# Altium PCB JlinkAdapter.PcbDoc
Units mil, origin at the board's own origin, x right, y up, seen from the top; angles counter-clockwise.
Board outline 669.29 x 1062.99 mil, 2 copper layers (Component Side, Bottom Layer), stack 63.824 mil thick; 4 components, 11 nets, 42 pads, 7 vias.
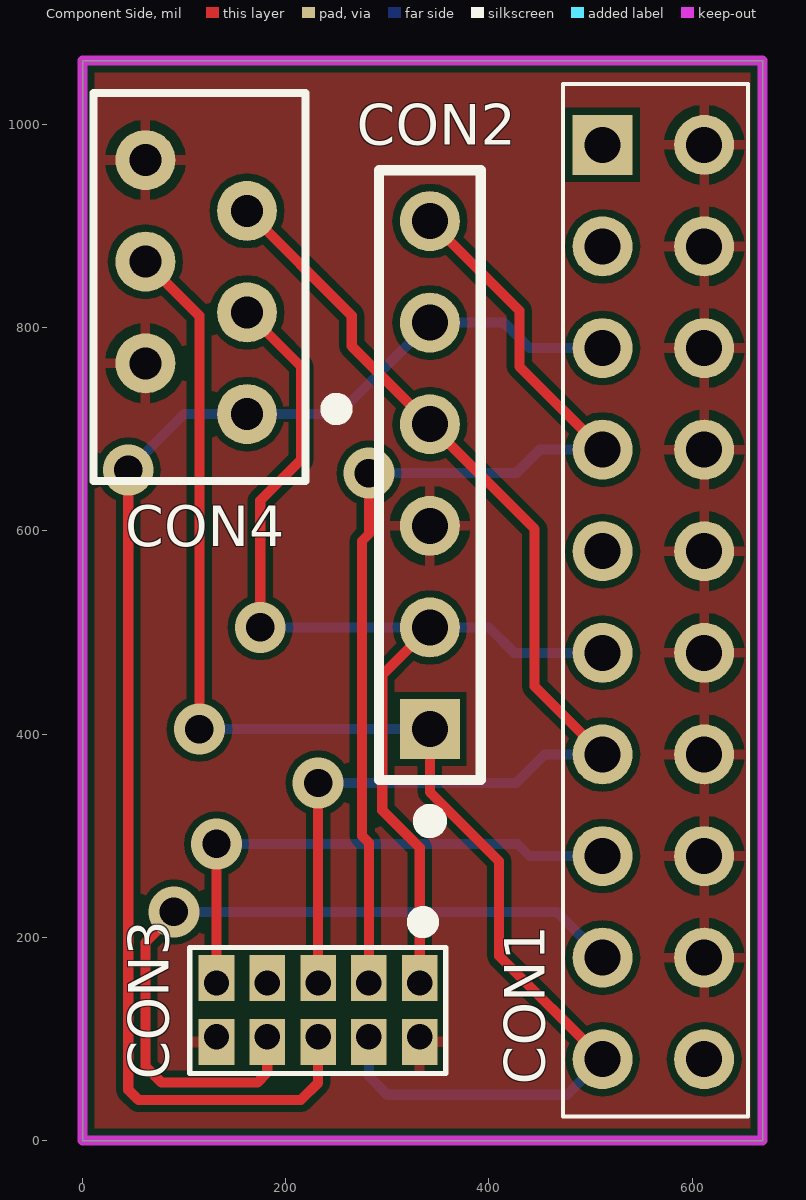
[diagram p0: Component Side view]
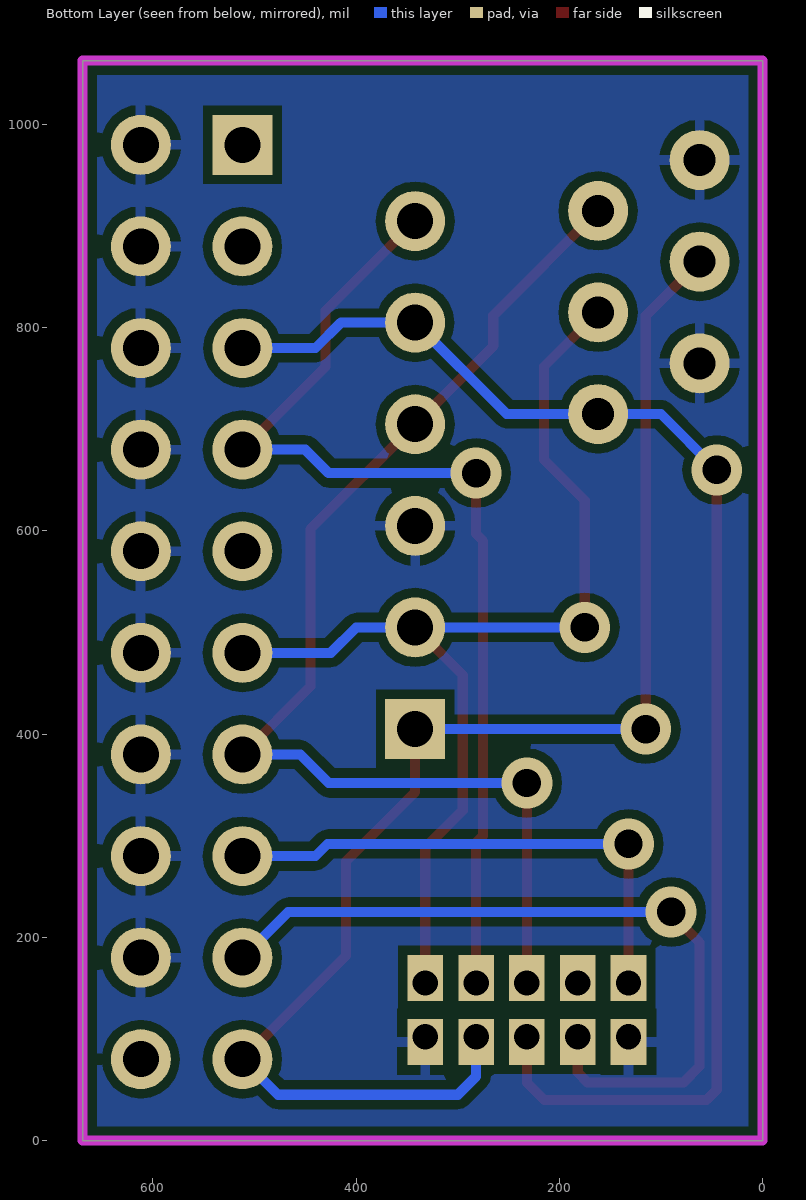
[diagram p1: Bottom Layer view, seen from below]

## Layer stack, top to bottom
Top Solder: solder mask 0.4, Solder Resist, Dk 3.5
Component Side: signal copper 1.4
Dielectric 1: core 61.0236, FR-4, Dk 4.2
Bottom Layer: signal copper 1.4
Solder Side: solder mask 0.4, Solder Resist, Dk 3.5

## Board outline
0,0 669.29,0 669.29,1062.99 0,1062.99

## Design rules (kind name [scope] priority, off if disabled: settings)
Clearance "Stitching GNDA" [IsStitchingVia and InNet('GNDA') vs (IsVia and (Not IsStitchingVia)) Or IsPad] p1: gap=5
Clearance Clearance_BOT [InNamedPolygon('GND_BOT')] p2: gap=9
Clearance Clearance_TOP [InNamedPolygon('GND_BOT')] p3: gap=9
Clearance [All] p4: gap=7
DiffPairsRouting DiffPair_100_2DiffPairsRouting [InDifferentialPairClass('DIFF100_2')] p1: maxlimit=10 minlimit=10 mostfreqgap=10 toplayer_minwidth=8 toplayer_maxwidth=15 toplayer_prefwidth=15 bottomlayer_minwidth=8 bottomlayer_maxwidth=15 bottomlayer_prefwidth=15 maxuncoupledlength=500
DiffPairsRouting DiffPair_100DiffPairsRouting [InDifferentialPairClass('DIFF100')] p2: maxlimit=10 minlimit=10 mostfreqgap=10 toplayer_minwidth=8 toplayer_maxwidth=15 toplayer_prefwidth=15 bottomlayer_minwidth=8 bottomlayer_maxwidth=15 bottomlayer_prefwidth=15 maxuncoupledlength=500
DiffPairsRouting [All] p3: maxlimit=10 minlimit=8 mostfreqgap=8 toplayer_minwidth=8 toplayer_maxwidth=30 toplayer_prefwidth=8 bottomlayer_minwidth=8 bottomlayer_maxwidth=30 bottomlayer_prefwidth=8 maxuncoupledlength=500
Height [All] p1: minheight=0 maxheight=2000 prefheight=500
HoleSize [All] p1: absolutevalues=TRUE maxlimit=200 minlimit=1 maxpercent=80.000 minpercent=20.000
MatchedLengths DiffPair_100_2MatchedLengths [InNetClass('DIFF100_A')] p1: tolerance=1000 checknetsindiffpair=TRUE checkdiffpairvsdiffpair=FALSE checkxsignals=FALSE checkothers=FALSE
MatchedLengths DiffPair_100MatchedLengths [InNetClass('DIFF100_B')] p2: tolerance=5 checknetsindiffpair=TRUE checkdiffpairvsdiffpair=FALSE checkxsignals=FALSE checkothers=FALSE
MinimumSolderMaskSliver [All] p1: minsoldermaskwidth=1
PasteMaskExpansion [InNet('230V_N')] p1: expansion=20
PlaneClearance [All] p1: clearance=10
PlaneConnect MotConnect [InNetClass('MOT[8..1]')] p1: planeconnectstyle=Direct reliefexpansion=20 reliefentries=4 reliefconductorwidth=10 reliefairgap=10
PlaneConnect Via_Thermal_Relief [IsStitchingVia Or IsVia] p2: planeconnectstyle=Direct reliefexpansion=20 reliefentries=4 reliefconductorwidth=10 reliefairgap=40
PlaneConnect ShieldConnect [InNet('SHIELD')] p3: planeconnectstyle=Relief reliefexpansion=20 reliefentries=4 reliefconductorwidth=10 reliefairgap=40
PlaneConnect [All] p4: planeconnectstyle=Relief reliefexpansion=8 reliefentries=4 reliefconductorwidth=8 reliefairgap=5
PolygonConnect GNDA_VIA_CONN [InNet('GND') And (IsStitchingVia Or IsVia)] p1: connectstyle=Direct reliefconductorwidth=10 reliefentries=4 polygonreliefangle="90 Angle" airgapwidth=10
PolygonConnect [All] p2: connectstyle=Relief reliefconductorwidth=10 reliefentries=4 polygonreliefangle="90 Angle" airgapwidth=10
RoutingVias [All] p1: holewidth=5.91 width=11.81 viastyle="Through Hole" minholewidth=5.91 minwidth=11.81 maxholewidth=500 maxwidth=1000
SilkToSilkClearance [All] p1: silktosilkclearance=5
SilkToSolderMaskClearance SilkscreenOverComponentPads [IsPad] p1: minsilkscreentomaskgap=1 clearancetoexposedcopper=TRUE
SolderMaskExpansion [InNet('230V_N')] p1: expansion=5
Width GND [InNet('GND')] p1: maxlimit=100 minlimit=8 preferedwidth=50
Width 3V3 [InNet('3V3')] p2: maxlimit=40 minlimit=8 preferedwidth=30
Width 5V [InNet('5V')] p3: maxlimit=90 minlimit=10 preferedwidth=60
Width 24V [InNet('24V')] p4: maxlimit=80 minlimit=10 preferedwidth=60
Width [All] p5: maxlimit=100 minlimit=6 preferedwidth=8
21 further rules are at their usual default settings.

## Components (designator, comment, footprint, x,y, rotation, side; value= is the part's Value field where it differs from the comment)
CON1 "Header_2x10" HEADER_2X10_ANGLE_FEMALE 561.89,530 r270 top
CON2 "SWD" HEADER_6 341.89,405 r90 top
CON3 "Header 5X2" HDR1X10_1.27mmp_MIN 231.89,155 r180 top
CON4 "AMP-7-215460-6" AMP-7-215460-6 111.89,840 r90 top

## Footprints (in the part's own frame and the unit in brackets; to place one, negate y for a bottom-side part, rotate by r counter-clockwise, add the part's x,y. Pads: shape width x height; smd on the part's side, far side on the other; paste and mask are expansions set on the pad)
AMP-7-215460-6 [mm] "Micro-Match Female On Board Side Entry Polarized"
  round 1.5 hole 0.8: 1(-3.175,-1.27) 2(-1.905,1.27) 3(-0.635,-1.27) 4(0.635,1.27) 5(1.905,-1.27) 6(3.175,1.27)
  silkscreen extent -4.85,-2.73 4.85,2.57, body extent -4.78,-2.73 4.78,2.57, height 5.8
HDR1X10_1.27mmp_MIN [mil] "Programming connector target; 10 Position with minimally sized pads, 0.050\" pitch"
  rect 35x45 hole 25 copper offset 0,-5 mask+3.94: 1(-100,0) 3(-50,0) 5(0,0) 7(50,0) 9(100,0)
  rect 35x45 hole 25 copper offset 0,5 mask+3.94: 2(-100,53) 4(-50,53) 6(0,53) 8(50,53) 10(100,53)
  silkscreen extent -126,-35 126,89, body extent -125,-32 125,86, height 185
HEADER_2X10_ANGLE_FEMALE [mm]
  rect 1.5x1.5 hole 0.9: 1(-11.43,-1.27)
  round 1.5 hole 0.9: 2(-11.43,1.27) 3(-8.89,-1.27) 4(-8.89,1.27) 5(-6.35,-1.27) 6(-6.35,1.27) 7(-3.81,-1.27) 8(-3.81,1.27) 9(-1.27,-1.27) 10(-1.27,1.27) 11(1.27,-1.27) 12(1.27,1.27) 13(3.81,-1.27) 14(3.81,1.27) 15(6.35,-1.27) 16(6.35,1.27) 17(8.89,-1.27) 18(8.89,1.27) 19(11.43,-1.27) 20(11.43,1.27)
  silkscreen extent -12.95,-2.27 12.86,2.36, body extent -12.86,-1.5 12.79,11.1, height 5
HEADER_6 [mm]
  rect 1.5x1.5 hole 0.9: 1(0,0)
  round 1.5 hole 0.9: 2(2.54,0) 3(5.08,0) 4(7.62,0) 5(10.16,0) 6(12.7,0)
  silkscreen extent -2.5,-1.27 13.97,1.27, body extent -1.17,-1.25 14.07,1.25, height 8.23

## Part data
CON2: library part SWD-HEADER
CON3: "Header, 5-Pin, Dual row"

## Via types
v1: diameter 50, hole 28, Component Side to Bottom Layer, tented both sides, 7 vias

## Nets (pads, with @x,y where several pads share a name; then routed paths per layer and width w, separated by ;. In a path a pad name is that pad's centre, name@x,y a point inside that pad or via, vN(x,y) a via of type N, cw(c..) or ccw(c..) an arc to the next point about the centre after c; other vN are vias at no path point)
5V: CON1.1
#RST: CON1.5 CON2.5 CON3.6 CON4.1 | length 1390.4
  Component Side w10: v1(45,660) 45,50 55,40 215,40 231.89,56.89 CON3.6
  Bottom Layer w10: v1(45,660) 100,715 CON4.1 251.89,715 CON2.5 415,805 440,780 CON1.5
#TRST: CON1.17 CON3.8 | length 772.7
  Component Side w10: v1(90,225) 92,225 62,195 62,73 78,57 172,57 181.89,66.89 CON3.8
  Bottom Layer w10: v1(90,225) 466.89,225 CON1.17
DBGRQ: CON1.3
GND: CON1.2 CON1.4 CON1.6 CON1.8 CON1.10 CON1.12 CON1.14 CON1.16 CON1.18 CON2.3 CON3.2 CON3.10 CON4.2 CON4.6
RTCK: CON1.9
TCK/SWCLK: CON1.11 CON2.2 CON3.1 CON4.3 | length 1080.5
  Component Side w10: CON4.3 215,761.89 215,670 175,630 v1(175,505) ; CON3.1 331.89,288.11 295,325 295,458.11 CON2.2
  Bottom Layer w10: v1(175,505) CON2.2 400,505 425,480 CON1.11
TDI: CON1.15 CON3.9 | length 521.8
  Component Side w10: CON3.9 v1(131.89,291.89)
  Bottom Layer w10: v1(131.89,291.89) 428.11,291.89 440,280 CON1.15
TDO/SWO: CON1.7 CON2.6 CON3.3 | length 1042.6
  Component Side w10: CON3.3 281.89,293.11 275,300 275,590 281.89,596.89 v1(281.89,656.89) ; CON2.6 430,816.89 430,761.89 CON1.7
  Bottom Layer w10: v1(281.89,656.89) 426.89,656.89 450,680 CON1.7
TMS/SWDIO: CON1.13 CON2.4 CON3.5 CON4.5 | length 1168.5
  Component Side w10: CON4.5 265,811.89 265,781.89 CON2.4 445,601.89 445,446.89 CON1.13 ; CON3.5 v1(231.89,351.89)
  Bottom Layer w10: v1(231.89,351.89) 426.89,351.89 455,380 CON1.13
VTREF: CON1.19 CON2.1 CON3.4 CON4.4 | length 1395.2
  Component Side w10: CON4.4 115,811.89 v1(115,405) ; CON2.1 341.89,343.11 410,275 410,181.89 CON1.19
  Bottom Layer w10: v1(115,405) CON2.1 ; CON3.4 281.89,63.11 300,45 476.89,45 CON1.19
pads on no net: CON1.20 CON3.7

## Polygon pours and split planes (outlines as drawn)
GND on Component Side "GND_TOP" (solid, pour order 0): 0,1065 670,1065 670,0 5,0 0,0
GND on Bottom Layer "GND_BOT" (solid, pour order 2): 0,1065 670,1065 670,0 5,0 0,0

## Keep-outs
Keep-Out Layer:
  the board outline again, w10

## Silkscreen, mask and mechanical layers (free items; w line width, h text height)
Top Overlay:
  circle w15.75: c250,720 r8
  circle w15.75: c335,215 r8